# Altium PCB Copy of motherboard.PcbDoc
Units mil, origin at the board's own origin, x right, y up, seen from the top; angles counter-clockwise.
Board outline 6000 x 4000 mil, 2 copper layers (Top Layer, Bottom Layer); 46 components, 51 nets, 314 pads, 1 vias.
Unrouted connection lines stored in the file: 158.
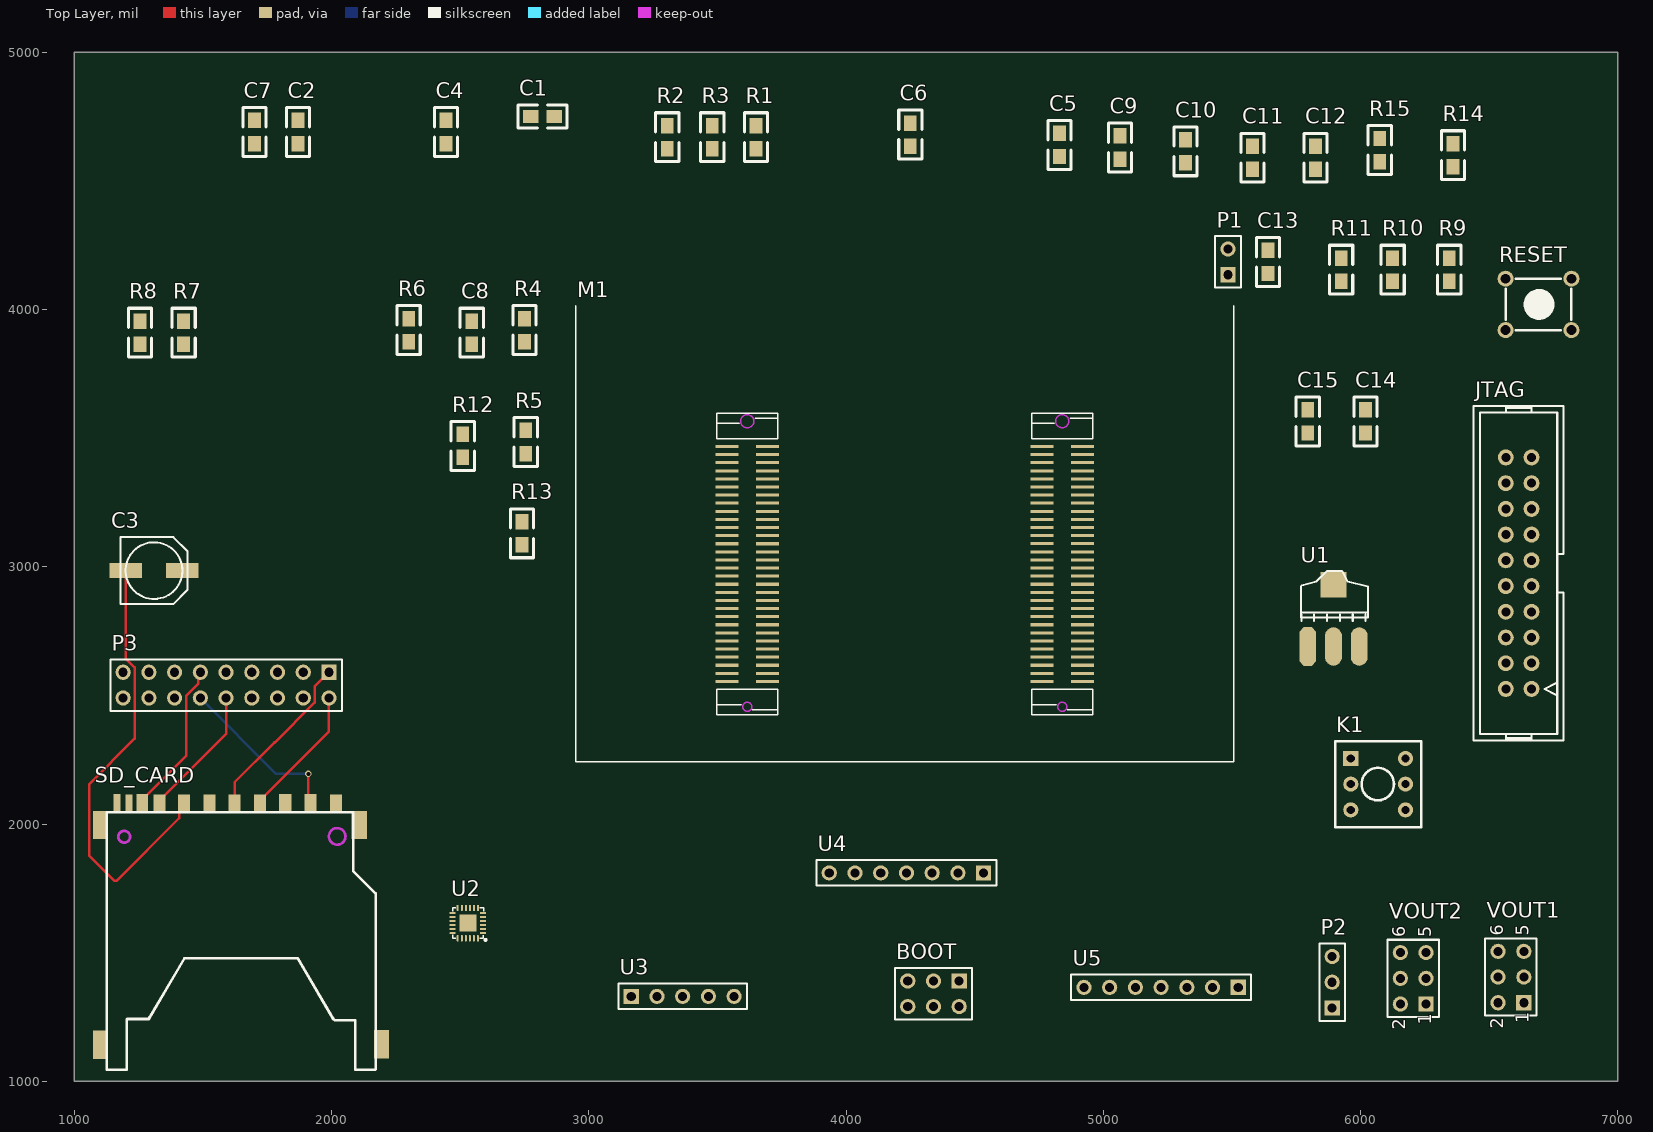
[diagram p0: Top Layer view]
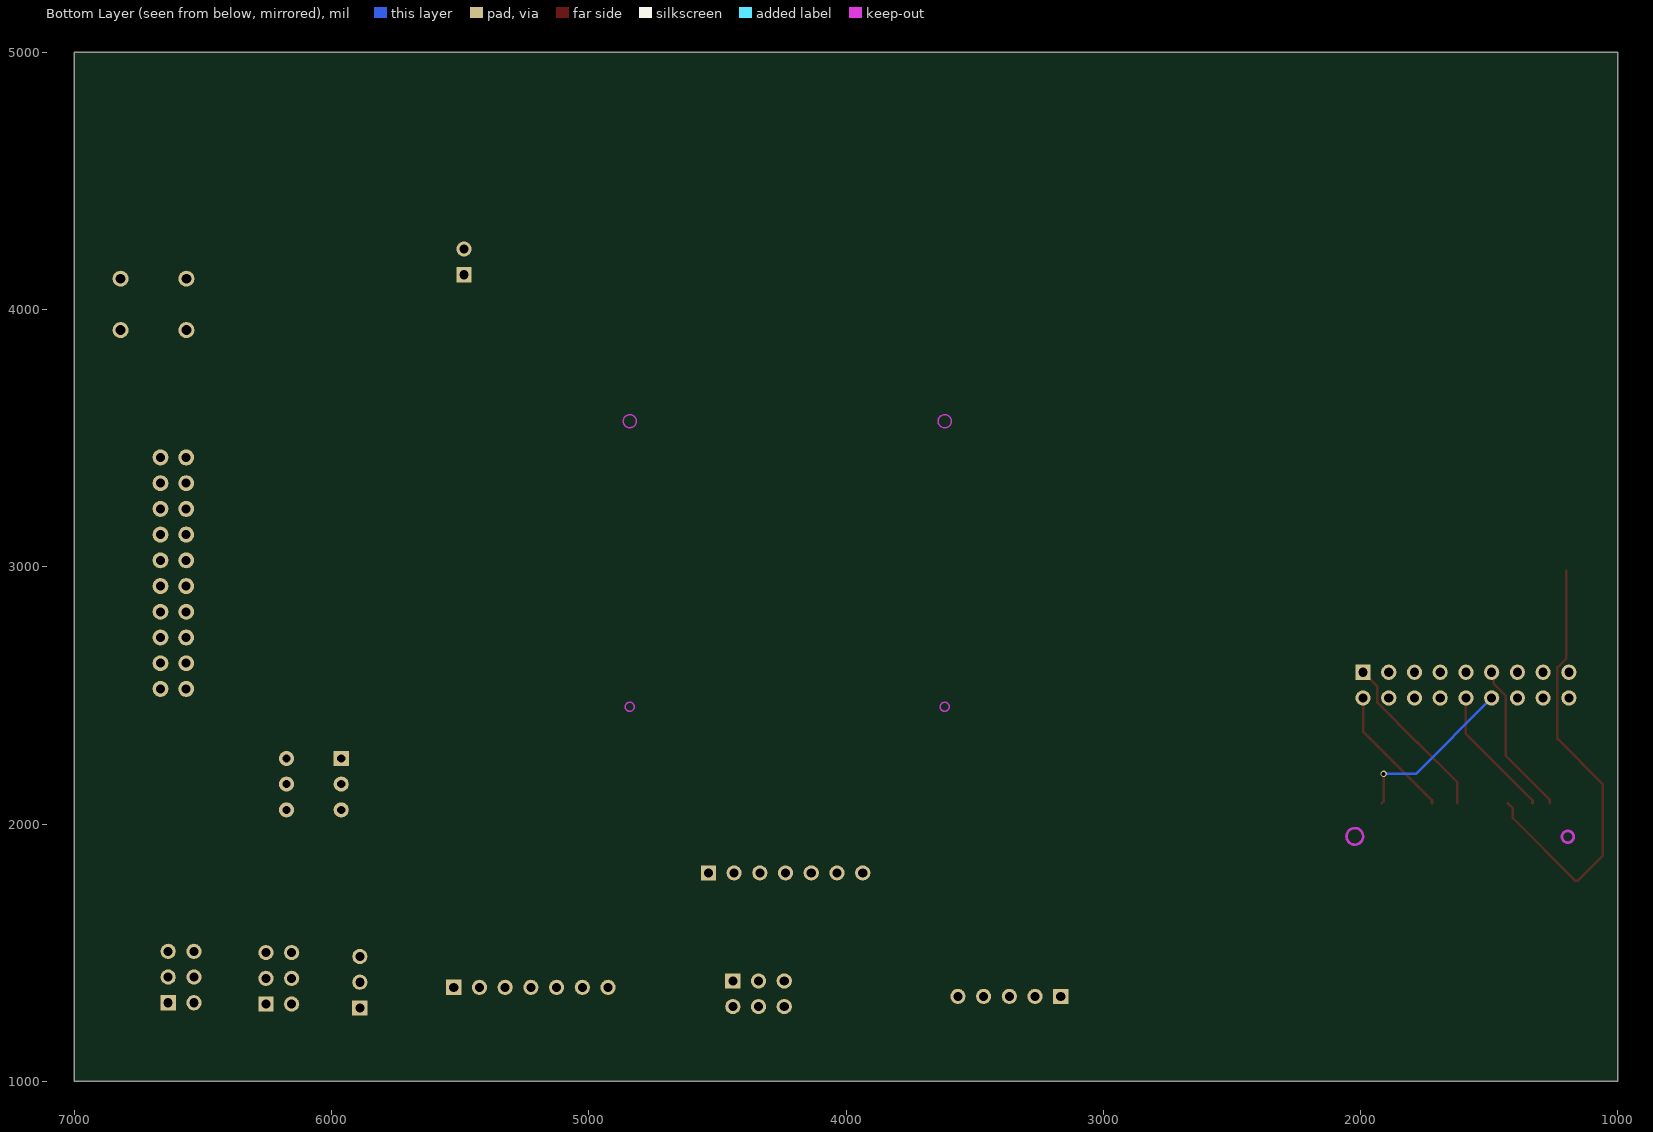
[diagram p1: Bottom Layer view, seen from below]

## Layer stack, top to bottom
Top Solder: solder mask 0.4, Solder Resist, Dk 3.5
Top Layer: signal copper 1.4
Dielectric 1: dielectric 12.6, FR-4, Dk 4.8
Bottom Layer: signal copper 1.4
Bottom Solder: solder mask 0.4, Solder Resist, Dk 3.5

## Board outline
1000,1000 7000,1000 7000,5000 1000,5000

## Design rules (kind name [scope] priority, off if disabled: settings)
Clearance [All] p1: gap=10 ignorepadtopadclearanceinfootprint=TRUE except(0: Arc-Hole Track-Hole SMDPad-Hole THPad-Hole Via-Hole Fill-Hole Poly-Hole Region-Hole Text-Hole)
PolygonConnect [All] p1: connectstyle=Relief reliefconductorwidth=10 reliefentries=4 polygonreliefangle="90 Angle" airgapwidth=10
RoutingVias [All] p1: holewidth=15 width=25 viastyle="Through Hole" minholewidth=15 minwidth=25 maxholewidth=15 maxwidth=25
SolderMaskExpansion [All] p1: expansion=4
Width [All] p1: maxlimit=10 minlimit=10 preferedwidth=10
30 further rules are at their usual default settings.

## Components (designator, comment, footprint, x,y, rotation, side; value= is the part's Value field where it differs from the comment)
BOOT "BOOT" HDR2X3 4440,1390 r180 top
C1 "104" 0805 2775,4750 r0 top
C2 "104" 0805 1870,4645 r90 top
C3 "220uF" CC6.56.5 1310,2985 r180 top
C4 "104" 0805 2445,4645 r90 top
C5 "6pF" 0805 4829.94,4595 r90 top
C6 "104" 0805 4249.94,4635 r90 top
C7 "104" 0805 1700,4645 r90 top
C8 "104" 0805 2545,3865 r90 top
C9 "104" 0805 5065,4585 r90 top
C10 "104" 0805 5320,4570 r90 top
C11 "104" 0805 5580,4545 r90 top
C12 "104" 0805 5824.94,4545 r90 top
C13 "104" 0805 5640,4140 r90 top
C14 "104" 0805 6020,3520 r90 top
C15 "104" 0805 5795,3520 r90 top
JTAG "JTAG" JTAG_20 6615,2975 r90 top
K1 "BUTTON" BTN8.5*8.5 5962.4,2255 r0 top
M1 "STM32F4&F7_CB" STM32F4&F7_CB 4919.39,3467.52 r180 top
P1 "VREF_SEL" HDR1X2 5485,4135 r90 top
P2 "PWM" HDR1X3 5890,1285 r90 top
P3 "OV5640" HDR2X9 1990,2590 r180 top
R1 "0R" 0805 3650,4625 r90 top
R2 "10K" 0805 3305,4625 r90 top
R3 "10K" 0805 3480,4625 r90 top
R4 "10K" 0805 2749.94,3875 r90 top
R5 "10K" 0805 2754.94,3440 r90 top
R6 "10K" 0805 2300,3965 r270 top
R7 "10K" 0805 1425,3865 r90 top
R8 "10K" 0805 1255,3865 r90 top
R9 "47K" 0805 6345,4110 r90 top
R10 "47K" 0805 6125,4110 r90 top
R11 "47K" 0805 5925,4110 r90 top
R12 "47K" 0805 2510,3425 r90 top
R13 "47K" 0805 2739.94,3085 r90 top
R14 "10R" 0805 6359.94,4555 r90 top
R15 "10R" 0805 6074.94,4575 r90 top
RESET "KEY_M" KEY_M 6564.09,4120 r0 top
SD_CARD "sd card" SDCARD_L 1918.03,2080.36 r0 top
U1 "AMS1117-3.3" AMS1117 5794.97,2690.06 r0 top
U2 "MPU9250" QFN24-t 2589,1575.5 r180 top
U3 "GPS" HDR1X5 3165,1330 r0 top
U4 "AS61-T17" HDR1X7 4535,1810 r180 top
U5 "ESP8266SPI" HDR1X7 5525,1365 r180 top
VOUT1 "VCC3.3" HDR2X3 6635,1305 r90 top
VOUT2 "VCC5" HDR2X3 6255,1300 r90 top

## Footprints (in the part's own frame and the unit in brackets; to place one, negate y for a bottom-side part, rotate by r counter-clockwise, add the part's x,y. Pads: shape width x height; smd on the part's side, far side on the other; paste and mask are expansions set on the pad)
0805 [mil]
  rect 60x50 smd: 1(0,-0.06) 2(90,-0.06)
  silkscreen extent -50,-45 140,45
AMS1117 [mil]
  oct 65x150 smd: 1(0.03,-0.06)
  oval 65x150 smd: 2(100.03,-0.06) 3(200.03,-0.06)
  rect 100x100 smd: 4(100.03,239.94)
  silkscreen extent -26,100 234,293
BTN8.5*8.5 [mm]
  rect 1.5x1.5 hole 0.8: 1(0,0)
  round 1.5 hole 0.8: 2(0,-2.54) 3(0,-5.08) 4(5.4,-5.08) 5(5.4,-2.54) 6(5.4,0)
  silkscreen extent -1.55,-6.79 6.95,1.71
CC6.56.5 [mm]
  rect 3.2x1.5 smd: 1(-2.794,0) 2(2.8,0)
  silkscreen extent -3.3,-3.3 3.3,3.3
HDR1X2 [mm]
  rect 1.5x1.5 hole 0.9: 1(0,0)
  round 1.5 hole 0.9: 2(2.54,0)
  silkscreen extent -1.27,-1.27 3.81,1.27
HDR1X3 [mm] "Connector; Header; 3 Position"
  rect 1.5x1.5 hole 0.9: 1(0,0)
  round 1.5 hole 0.9: 2(2.54,0) 3(5.08,0)
  silkscreen extent -1.27,-1.27 6.35,1.27
HDR1X5 [mm] "Connector; Header; 5 Position"
  rect 1.5x1.5 hole 0.9: 1(0,0)
  round 1.5 hole 0.9: 2(2.54,0) 3(5.08,0) 4(7.62,0) 5(10.16,0)
  silkscreen extent -1.27,-1.27 11.43,1.27
HDR1X7 [mm] "Connector; Header; 7 Position"
  rect 1.5x1.5 hole 0.9: 1(0,0)
  round 1.5 hole 0.9: 2(2.54,0) 3(5.08,0) 4(7.62,0) 5(10.16,0) 6(12.7,0) 7(15.24,0)
  silkscreen extent -1.27,-1.27 16.51,1.27
HDR2X3 [mm]
  rect 1.5x1.5 hole 0.9: 1(0,0)
  round 1.5 hole 0.9: 2(0,2.54) 3(2.54,0) 4(2.54,2.54) 5(5.08,0) 6(5.08,2.54)
  silkscreen extent -1.27,-1.27 6.35,3.81
HDR2X9 [mm]
  rect 1.5x1.5 hole 0.9: 1(0,0)
  round 1.5 hole 0.9: 2(0,2.54) 3(2.54,0) 4(2.54,2.54) 5(5.08,0) 6(5.08,2.54) 7(7.62,0) 8(7.62,2.54) 9(10.16,0) 10(10.16,2.54) 11(12.7,0) 12(12.7,2.54) 13(15.24,0) 14(15.24,2.54) 15(17.78,0) 16(17.78,2.54) 17(20.32,0) 18(20.32,2.54)
  silkscreen extent -1.27,-1.27 21.59,3.81
JTAG_20 [mil]
  round 62 hole 35: 1(-450,-50) 2(-450,50) 3(-350,-50) 4(-350,50) 5(-250,-50) 6(-250,50) 7(-150,-50) 8(-150,50) 9(-50,-50) 10(-50,50) 11(50,-50) 12(50,50) 13(150,-50) 14(150,50) 15(250,-50) 16(250,50) 17(350,-50) 18(350,50) 19(450,-50) 20(450,50)
  silkscreen extent -650,-175 650,175
KEY_M [mil]
  round 62 hole 38: 1(0,0) 1(255.91,0) 2(0,-200) 2(255.91,-200)
  silkscreen extent 0,-200 255,0
QFN24-t [mm]
  rrect50% 0.6x0.2 smd: 1(0,0) 2(0,-0.4) 3(0,-0.8) 4(0,-1.2) 5(0,-1.6) 6(0,-2) 13(3,-2) 14(3,-1.6) 15(3,-1.2) 16(3,-0.8) 17(3,-0.4) 18(3,0)
  rrect50% 0.2x0.6 smd: 7(0.5,-2.5) 8(0.9,-2.5) 9(1.3,-2.5) 10(1.7,-2.5) 11(2.1,-2.5) 12(2.5,-2.5) 19(2.5,0.5) 20(2.1,0.5) 21(1.7,0.5) 22(1.3,0.5) 23(0.9,0.5) 24(0.5,0.5)
  rect 1.7x1.7 smd: 25(1.499,-1.003)
  silkscreen extent -0.36,-2.5 3,0.76
SDCARD_L [mm]
  rect 1.2x1.8 smd: 1(0,0) 2(-2.489,0) 3(-4.983,-0.009) 4(-7.483,-0.009) 5(-9.983,-0.009) 6(-12.483,-0.009) 7(-14.908,-0.009) 9(2.517,-0.009)
  rect 1.1x1.8 smd: 8(-16.612,0)
  rect 0.7x1.8 smd: 10(-17.908,-0.009) 12(-19.101,0)
  rect 1.5x2.8 smd: 11(-20.726,-23.834) 11(-20.726,-2.143) 11(4.826,-2.143) 11(7.01,-23.784)
  Keep-Out Layer circle w0.254: c2.642,-3.26 r0.82
  Keep-Out Layer circle w0.254: c-18.39,-3.3 r0.58
  silkscreen extent -20.13,-26.3 6.44,-0.9
STM32F4&F7_CB [mm]
  rect 2.3x0.3 smd: J1_1(0,0) J1_2(0,0.8) J1_3(0,1.6) J1_4(0,2.4) J1_5(0,3.2) J1_6(0,4) J1_7(0,4.8) J1_8(0,5.6) J1_9(0,6.4) J1_10(0,7.2) J1_11(0,8) J1_12(0,8.8) J1_13(0,9.6) J1_14(0,10.4) J1_15(0,11.2) J1_16(0,12) J1_17(0,12.8) J1_18(0,13.6) J1_19(0,14.4) J1_20(0,15.2) J1_21(0,16) J1_22(0,16.8) J1_23(0,17.6) J1_24(0,18.4) J1_25(0,19.2) J1_26(0,20) J1_27(0,20.8) J1_28(0,21.6) J1_29(0,22.4) J1_30(0,23.2) J1_31(4,23.2) J1_32(4,22.4) J1_33(4,21.6) J1_34(4,20.8) J1_35(4,20) J1_36(4,19.2) J1_37(4,18.4) J1_38(4,17.6) J1_39(4,16.8) J1_40(4,16) J1_41(4,15.2) J1_42(4,14.4) J1_43(4,13.6) J1_44(4,12.8) J1_45(4,12) J1_46(4,11.2) J1_47(4,10.4) J1_48(4,9.6) J1_49(4,8.8) J1_50(4,8) J1_51(4,7.2) J1_52(4,6.4) J1_53(4,5.6) J1_54(4,4.8) J1_55(4,4) J1_56(4,3.2) J1_57(4,2.4) J1_58(4,1.6) J1_59(4,0.8) J1_60(4,0) J2_1(31.1,0.001) J2_2(31.1,0.801) J2_3(31.1,1.601) J2_4(31.1,2.401) J2_5(31.1,3.201) J2_6(31.1,4.001) J2_7(31.1,4.801) J2_8(31.1,5.601) J2_9(31.1,6.401) J2_10(31.1,7.201) J2_11(31.1,8.001) J2_12(31.1,8.801) J2_13(31.1,9.601) J2_14(31.1,10.401) J2_15(31.1,11.201) J2_16(31.1,12.001) J2_17(31.1,12.801) J2_18(31.1,13.601) J2_19(31.1,14.401) J2_20(31.1,15.201) J2_21(31.1,16.001) J2_22(31.1,16.801) J2_23(31.1,17.601) J2_24(31.1,18.401) J2_25(31.1,19.201) J2_26(31.1,20.001) J2_27(31.1,20.801) J2_28(31.1,21.601) J2_29(31.1,22.401) J2_30(31.1,23.201) J2_31(35.1,23.201) J2_32(35.1,22.401) J2_33(35.1,21.601) J2_34(35.1,20.801) J2_35(35.1,20.001) J2_36(35.1,19.201) J2_37(35.1,18.401) J2_38(35.1,17.601) J2_39(35.1,16.801) J2_40(35.1,16.001) J2_41(35.1,15.201) J2_42(35.1,14.401) J2_43(35.1,13.601) J2_44(35.1,12.801) J2_45(35.1,12.001) J2_46(35.1,11.201) J2_47(35.1,10.401) J2_48(35.1,9.601) J2_49(35.1,8.801) J2_50(35.1,8.001) J2_51(35.1,7.201) J2_52(35.1,6.401) J2_53(35.1,5.601) J2_54(35.1,4.801) J2_55(35.1,4.001) J2_56(35.1,3.201) J2_57(35.1,2.401) J2_58(35.1,1.601) J2_59(35.1,0.801) J2_60(35.1,0.001)
  Keep-Out Layer circle w0.152: c2,25.7 r0.45
  Keep-Out Layer circle w0.152: c2,-2.5 r0.65
  Keep-Out Layer circle w0.152: c33.1,-2.499 r0.65
  Keep-Out Layer circle w0.152: c33.1,25.701 r0.45
  silkscreen extent -14.95,-13.87 50.05,31.13

## Part data
BOOT VOUT1 VOUT2: library part "Header 3X2", "Header, 3-Pin, Dual row"
  VOUT1 VOUT2: LatestRevisionDate=17-Jul-2002, LatestRevisionNote="Re-released for DXP Platform.", Publisher="Altium Limited"
C1 C2 C4 C5 C6 C7 C8 C9 C10 C11 C12 C13 C14 C15: library part C
C3: library part CAP
M1: "F429/746 Core Board"
P1: library part "Header 2", "Header, 2-Pin"
P2: library part "Header 3", "Header, 3-Pin", LatestRevisionDate=17-Jul-2002, LatestRevisionNote="Re-released for DXP Platform.", Publisher="Altium Limited"
P3: library part "Header 9X2", "Header, 9-Pin, Dual row"
R1 R2 R3 R4 R5 R6 R7 R8 R9 R10 R11 R12 R13 R14 R15: library part R
U1: library part AMS1117
U2: "9轴运动处理传感器"
U3: library part "Header 5", "Header, 5-Pin", LatestRevisionDate=17-Jul-2002, LatestRevisionNote="Re-released for DXP Platform.", Publisher="Altium Limited"
U4 U5: library part "Header 7", "Header, 7-Pin", LatestRevisionDate=17-Jul-2002, LatestRevisionNote="Re-released for DXP Platform.", Publisher="Altium Limited"

## Via types
v1: diameter 25, hole 15, Top Layer to Bottom Layer, 1 vias

## Nets (pads, with @x,y where several pads share a name; then routed paths per layer and width w, separated by ;. In a path a pad name is that pad's centre, name@x,y a point inside that pad or via, vN(x,y) a via of type N, cw(c..) or ccw(c..) an arc to the next point about the centre after c; other vN are vias at no path point)
9D_INT: M1.J2_8 U2.12
AS_AUX: M1.J2_25 U4.5
AS_MD0: M1.J1_33 U4.1
AS_MD1: M1.J1_32 U4.2
AS_RXD: M1.J2_2 U4.3
AS_TXD: M1.J2_1 U4.4
BOOT0: M1.J1_31 R2.1
BOOT1: M1.J1_55 R3.2
DCMI_D0: M1.J2_16 P3.8
DCMI_D1: M1.J2_17 P3.9
DCMI_D2: M1.J2_18 P3.10 R12.1 SD_CARD.7 | length 517.2
  Top Layer w10: SD_CARD.7 1331.1,2091.81 1590,2350.71 P3.10
DCMI_D3: M1.J2_19 P3.11 R13.1 SD_CARD.8 | length 603.2
  Top Layer w10: SD_CARD.8 1264.03,2094.14 1434.53,2264.64 1434.53,2497.5 1482.5,2545.47 1482.5,2582.5 P3.11
DCMI_D4: M1.J1_39 P3.12 R10.1 SD_CARD.1 | length 660.2
  Top Layer w10: v1(1910,2195) 1910,2088.39 SD_CARD.1
  Bottom Layer w10: P3.12 1785,2195 v1(1910,2195)
DCMI_D5: M1.J1_36 P3.13
DCMI_D6: M1.J1_26 P3.14
DCMI_D7: M1.J1_27 P3.15
DCMI_HREF: M1.J2_3 P3.5
DCMI_PCLK: M1.J1_47 P3.16
DCMI_PWDN: M1.J1_34 P3.18
DCMI_RESET: JTAG.5 M1.J1_41 P3.7 R5.2
DCMI_SCL: JTAG.3 M1.J1_22 P3.4 R4.2
DCMI_SDA: JTAG.13 M1.J1_21 P3.6 R7.2
DCMI_VSYNC: M1.J1_25 P3.3
DCMI_XCLK: M1.J2_20 P3.17
GND: BOOT.5 BOOT.6 C1.2 C2.1 C3.2 C4.2 C5.1 C6.1 C7.2 C8.1 C9.1 C10.1 C11.1 C12.1 C13.1 C14.1 C15.2 JTAG.4 JTAG.6 JTAG.8 JTAG.10 JTAG.12 JTAG.14 JTAG.16 JTAG.18 JTAG.20 M1.J1_1 M1.J1_30 M1.J2_31 P3.2 R8.1 RESET.2 SD_CARD.3 SD_CARD.6 U1.1 U2.9 U2.11 U2.18 U2.20 U3.2 U4.7 U5.7 VOUT1.1 VOUT1.3 VOUT1.5 VOUT2.1 VOUT2.3 VOUT2.5 | length 2273.2
  Top Layer w10: C3.2 1199.76,2643.21 1234.53,2608.44 1234.53,2331.48 1057.5,2154.46 1057.5,1877.5 1155.86,1779.14 1164.14,1779.14 1407.95,2022.95 1407.95,2061.38 SD_CARD.6 ; SD_CARD.3 1721.85,2091.81 1990,2359.96 P3.2
GPS_PPS: M1.J1_15 U3.5
GPS_RXD: M1.J1_4 U3.4
GPS_TXD: M1.J1_44 U3.3
IIC_SCL: M1.J1_8 U2.23
IIC_SDA: M1.J1_7 U2.24
JTCK: JTAG.9 M1.J1_42 R8.2
JTMS: JTAG.7 M1.J1_43 R6.2
NetBOOT_3: BOOT.3 R2.2
NetBOOT_4: BOOT.4 R3.1
NetC5_2: C5.2 P1.2 R15.1
NetC9_2: C9.2 C10.2 C11.2 R14.1 U2.1 U2.8 U2.13
NetC12_2: C12.2 U2.10
PWM: M1.J1_57 P2.1 P2.2 P2.3
RESET: C1.1 JTAG.15 M1.J1_10 R1.1 RESET.1
SDIO_CMD: M1.J1_37 R11.1 SD_CARD.2
SDIO_D2: M1.J1_40 R9.1 SD_CARD.9
SDIO_SCK: M1.J1_38 SD_CARD.5
SPI_CS: M1.J1_18 U5.5
SPI_MISO: M1.J1_17 U5.3
SPI_MOSI: M1.J1_16 U5.4
SPI_RESET: M1.J1_19 U5.6
SPI_SCK: M1.J1_20 U5.2
VBTN: K1.3 VOUT2.2 VOUT2.4 VOUT2.6
VCC3.3: BOOT.1 BOOT.2 C2.2 C3.1 C7.1 C8.2 C15.1 JTAG.1 JTAG.2 P3.1 R1.2 R4.1 R5.1 R6.1 R7.1 R9.2 R10.2 R11.2 R12.2 R13.2 R14.2 R15.2 SD_CARD.4 U1.2 U1.4 U5.1 VOUT1.2 VOUT1.4 VOUT1.6 | length 662.9
  Top Layer w10: SD_CARD.4 1623.42,2162.31 1778.04,2316.94 1779.91,2316.94 1934.53,2471.56 1934.53,2534.53 P3.1
VCC5: C4.1 C6.2 C13.2 C14.2 K1.2 M1.J1_58 M1.J1_59 M1.J1_60 U1.3 U3.1 U4.6
VREF+: M1.J1_2 P1.1
pads on no net: JTAG.11 JTAG.17 JTAG.19 K1.1 K1.4 K1.5 K1.6 M1.J1_3 M1.J1_5 M1.J1_6 M1.J1_9 M1.J1_11 M1.J1_12 M1.J1_13 M1.J1_14 M1.J1_23 M1.J1_24 M1.J1_28 M1.J1_29 M1.J1_35 M1.J1_45 M1.J1_46 M1.J1_48 M1.J1_49 M1.J1_50 M1.J1_51 M1.J1_52 M1.J1_53 M1.J1_54 M1.J1_56 M1.J2_4 M1.J2_5 M1.J2_6 M1.J2_7 M1.J2_9 M1.J2_10 M1.J2_11 M1.J2_12 M1.J2_13 M1.J2_14 M1.J2_15 M1.J2_21 M1.J2_22 M1.J2_23 M1.J2_24 M1.J2_26 M1.J2_27 M1.J2_28 M1.J2_29 M1.J2_30 M1.J2_32 M1.J2_33 M1.J2_34 M1.J2_35 M1.J2_36 M1.J2_37 M1.J2_38 M1.J2_39 M1.J2_40 M1.J2_41 M1.J2_42 M1.J2_43 M1.J2_44 M1.J2_45 M1.J2_46 M1.J2_47 M1.J2_48 M1.J2_49 M1.J2_50 M1.J2_51 M1.J2_52 M1.J2_53 M1.J2_54 M1.J2_55 M1.J2_56 M1.J2_57 M1.J2_58 M1.J2_59 M1.J2_60 SD_CARD.10 SD_CARD.11 SD_CARD.12 U2.2 U2.3 U2.4 U2.5 U2.6 U2.7 U2.14 U2.15 U2.16 U2.17 U2.19 U2.21 U2.22 U2.25

## Text inside footprints (layer, text, board x,y; h text height)
VOUT1: Top Overlay "6" at 6555,1565 h50 r90; Top Overlay "5" at 6655,1565 h50 r90; Top Overlay "2" at 6555,1205 h50 r90; Top Overlay "1" at 6655,1225 h50 r90
VOUT2: Top Overlay "6" at 6175,1560 h50 r90; Top Overlay "5" at 6275,1560 h50 r90; Top Overlay "2" at 6175,1200 h50 r90; Top Overlay "1" at 6275,1220 h50 r90